# EAGLE board comms_v0 (EAGLE 9.6.2)
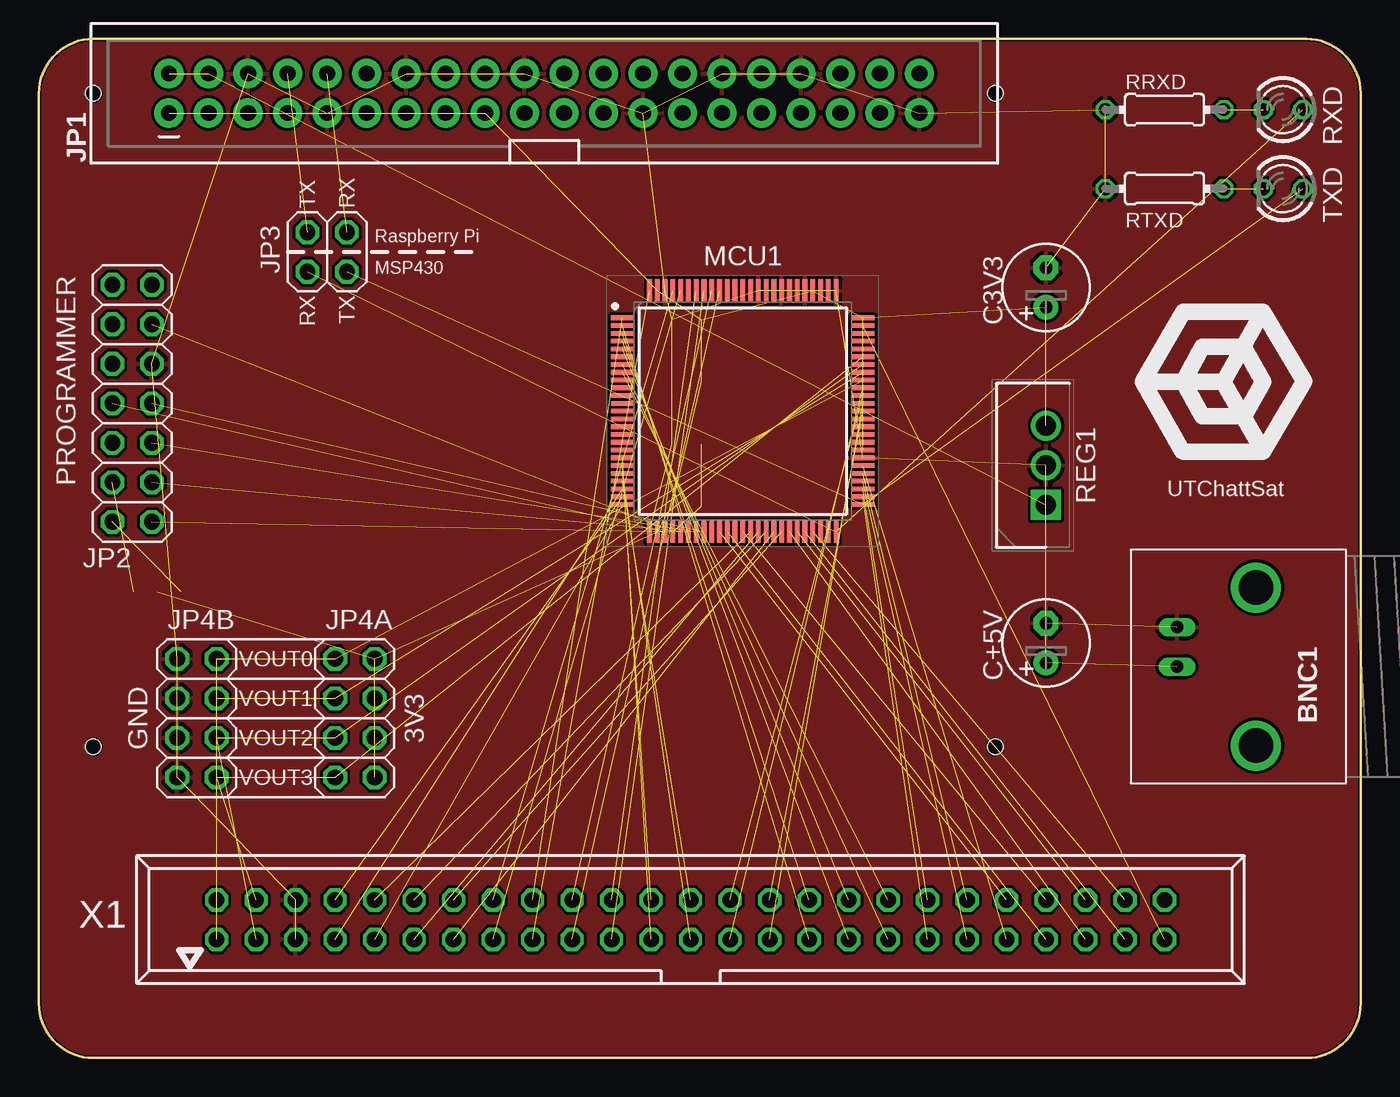
[diagram p0: board, top side]
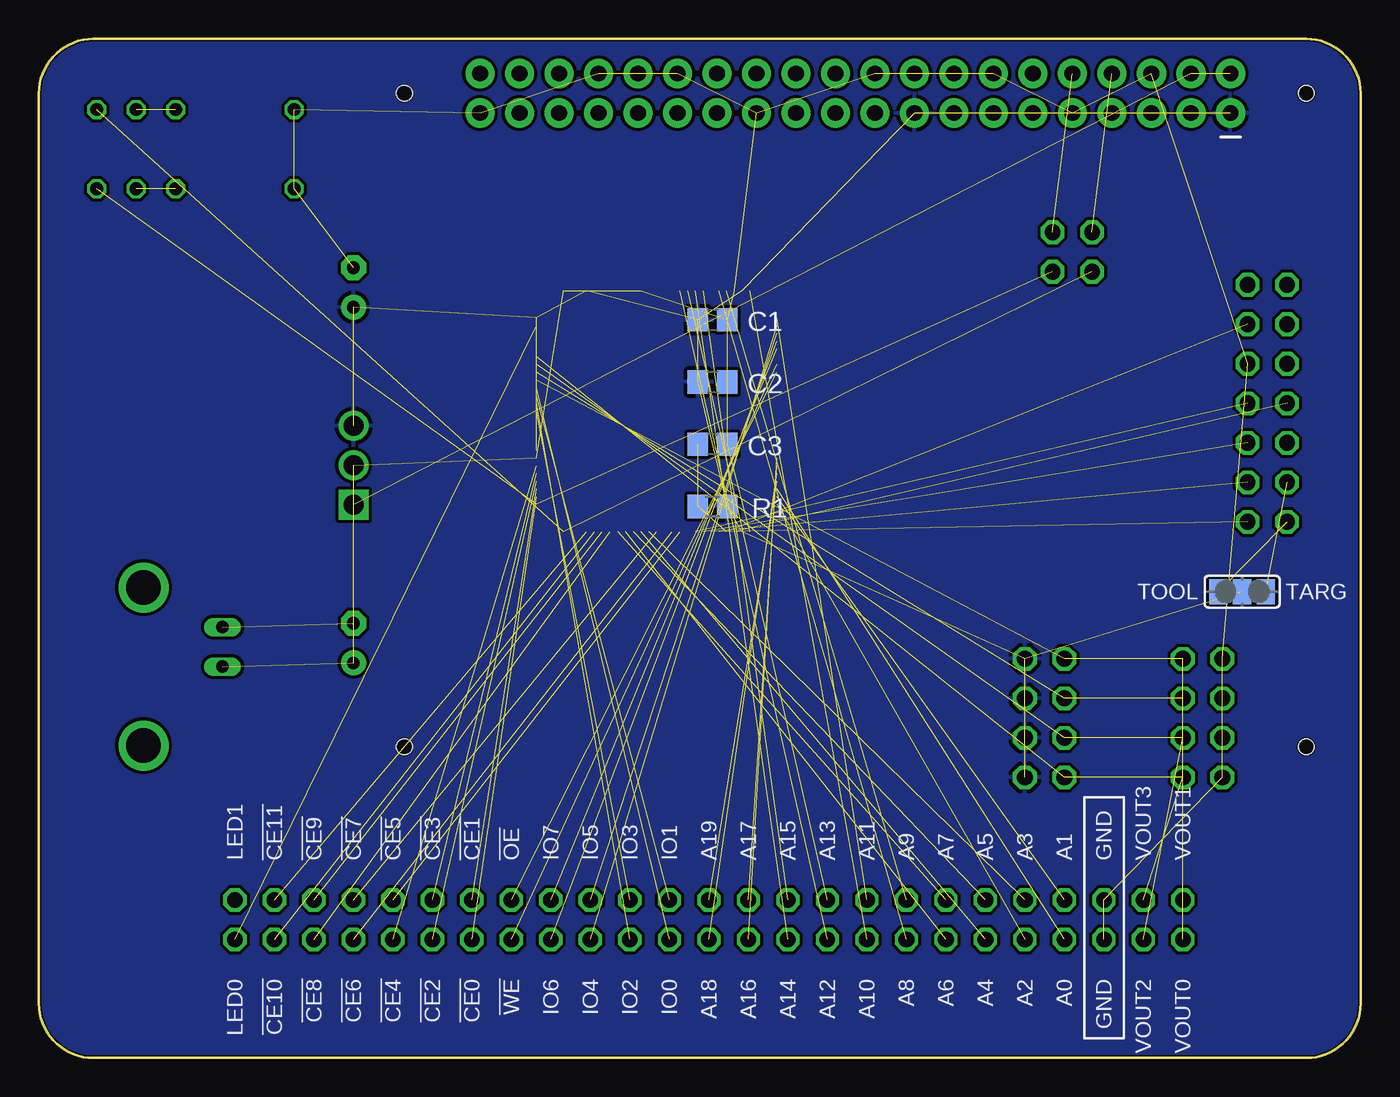
[diagram p1: board, bottom side, seen from below]

Size 85 x 65.51 mm. Coordinates in mm from the lower left corner, seen from the top.
Outline: 3.5,0 81.5,0 arc90 85,3.5 85,62.01 arc90 81.5,65.51 3.5,65.51 arc90 0,62.01 0,3.5 arc90 3.5,0
Copper layers (1*16): Top 0.035mm / dielectric 0.2mm / Bottom 0.035mm
Design rules "jlcpcb-2-layer *": minimum track width 10mil, minimum drill 0.2mm, track to track 8mil, track to pad 5mil, pad to pad 5mil, via to via 5mil, smd to smd 0mil, copper to edge 0.1mm, drill to drill 5mil, minimum pad ring 4mil, minimum via ring 4mil, stop-mask expansion 3mil, vias tented up to drill 100mil, thermal gap 10mil
Net classes: 2 lowpower: width 0.305 mm, drill 0.483 mm
Holes 1 mm at 3.5,62.01 61.5,62.01 61.5,20.01 3.5,20.01

## Footprints (pad centres in the part's own frame; a part is rotated, then mirrored left to right if it is on the bottom)
BNC = drill 2.2: 3 -5.08,5.08; 4 5.08,5.08 | drill 0.8 long: GND -2.54,0; S 0,0
C0805 = smd 1.3 x 1.5: 1 -0.95,0; 2 0.95,0
E2,5-6 = drill 0.813 pad 1.6: + -1.27,0 | drill 0.813 pad 1.6 octagon: - 1.27,0
2X20_SHROUDED = drill 1.016 pad 1.88: 1 -1.27,24.13; 2 1.27,24.13; 3 -1.27,21.59; 4 1.27,21.59; 5 -1.27,19.05; 6 1.27,19.05; 7 -1.27,16.51; 8 1.27,16.51; 9 -1.27,13.97; 10 1.27,13.97; 11 -1.27,11.43; 12 1.27,11.43; 13 -1.27,8.89; 14 1.27,8.89; 15 -1.27,6.35; 16 1.27,6.35; 17 -1.27,3.81; 18 1.27,3.81; 19 -1.27,1.27; 20 1.27,1.27; 21 -1.27,-1.27; 22 1.27,-1.27; 23 -1.27,-3.81; 24 1.27,-3.81; 25 -1.27,-6.35; 26 1.27,-6.35; 27 -1.27,-8.89; 28 1.27,-8.89; 29 -1.27,-11.43; 30 1.27,-11.43; 31 -1.27,-13.97; 32 1.27,-13.97; 33 -1.27,-16.51; 34 1.27,-16.51; 35 -1.27,-19.05; 36 1.27,-19.05; 37 -1.27,-21.59; 38 1.27,-21.59; 39 -1.27,-24.13; 40 1.27,-24.13
2X07 = drill 1.016 octagon: 1 -7.62,-1.27; 2 -7.62,1.27; 3 -5.08,-1.27; 4 -5.08,1.27; 5 -2.54,-1.27; 6 -2.54,1.27; 7 0,-1.27; 8 0,1.27; 9 2.54,-1.27; 10 2.54,1.27; 11 5.08,-1.27; 12 5.08,1.27; 13 7.62,-1.27; 14 7.62,1.27
2X02 = drill 1.016 octagon: 1 -1.27,-1.27; 2 -1.27,1.27; 3 1.27,-1.27; 4 1.27,1.27
2X04 = drill 1.016 octagon: 1 -3.81,-1.27; 2 -3.81,1.27; 3 -1.27,-1.27; 4 -1.27,1.27; 5 1.27,-1.27; 6 1.27,1.27; 7 3.81,-1.27; 8 3.81,1.27
QFP50P1600X1600X160-100N = smd 1.475 x 0.3: 1 -7.738,6; 2 -7.738,5.5; 3 -7.738,5; 4 -7.738,4.5; 5 -7.738,4; 6 -7.738,3.5; 7 -7.738,3; 8 -7.738,2.5; 9 -7.738,2; 10 -7.738,1.5; 11 -7.738,1; 12 -7.738,0.5; 13 -7.738,0; 14 -7.738,-0.5; 15 -7.738,-1; 16 -7.738,-1.5; 17 -7.738,-2; 18 -7.738,-2.5; 19 -7.738,-3; 20 -7.738,-3.5; 21 -7.738,-4; 22 -7.738,-4.5; 23 -7.738,-5; 24 -7.738,-5.5; 25 -7.738,-6; 51 7.738,-6; 52 7.738,-5.5; 53 7.738,-5; 54 7.738,-4.5; 55 7.738,-4; 56 7.738,-3.5; 57 7.738,-3; 58 7.738,-2.5; 59 7.738,-2; 60 7.738,-1.5; 61 7.738,-1; 62 7.738,-0.5; 63 7.738,0; 64 7.738,0.5; 65 7.738,1; 66 7.738,1.5; 67 7.738,2; 68 7.738,2.5; 69 7.738,3; 70 7.738,3.5; 71 7.738,4; 72 7.738,4.5; 73 7.738,5; 74 7.738,5.5; 75 7.738,6 | smd 0.3 x 1.475: 26 -6,-7.738; 27 -5.5,-7.738; 28 -5,-7.738; 29 -4.5,-7.738; 30 -4,-7.738; 31 -3.5,-7.738; 32 -3,-7.738; 33 -2.5,-7.738; 34 -2,-7.738; 35 -1.5,-7.738; 36 -1,-7.738; 37 -0.5,-7.738; 38 0,-7.738; 39 0.5,-7.738; 40 1,-7.738; 41 1.5,-7.738; 42 2,-7.738; 43 2.5,-7.738; 44 3,-7.738; 45 3.5,-7.738; 46 4,-7.738; 47 4.5,-7.738; 48 5,-7.738; 49 5.5,-7.738; 50 6,-7.738; 76 6,7.738; 77 5.5,7.738; 78 5,7.738; 79 4.5,7.738; 80 4,7.738; 81 3.5,7.738; 82 3,7.738; 83 2.5,7.738; 84 2,7.738; 85 1.5,7.738; 86 1,7.738; 87 0.5,7.738; 88 0,7.738; 89 -0.5,7.738; 90 -1,7.738; 91 -1.5,7.738; 92 -2,7.738; 93 -2.5,7.738; 94 -3,7.738; 95 -3.5,7.738; 96 -4,7.738; 97 -4.5,7.738; 98 -5,7.738; 99 -5.5,7.738; 100 -6,7.738
R0805 = smd 1.3 x 1.5: 1 -0.95,0; 2 0.95,0
TO254P470X1028X1955-3P = drill 1.29 pad 1.935 square: 1 0,0 | drill 1.29 pad 1.935: 2 2.54,0; 3 5.08,0
0204/7 = drill 0.813 octagon: 1 -3.81,0; 2 3.81,0
LED3MM = drill 0.813 octagon: A -1.27,0; K 1.27,0
SJ_2 = smd 1.168 x 1.6: 1 -1.524,0; 2 0,0; 3 1.524,0
057-050-1 = drill 1 octagon: 1 -30.48,-1.27; 2 -30.48,1.27; 3 -27.94,-1.27; 4 -27.94,1.27; 5 -25.4,-1.27; 6 -25.4,1.27; 7 -22.86,-1.27; 8 -22.86,1.27; 9 -20.32,-1.27; 10 -20.32,1.27; 11 -17.78,-1.27; 12 -17.78,1.27; 13 -15.24,-1.27; 14 -15.24,1.27; 15 -12.7,-1.27; 16 -12.7,1.27; 17 -10.16,-1.27; 18 -10.16,1.27; 19 -7.62,-1.27; 20 -7.62,1.27; 21 -5.08,-1.27; 22 -5.08,1.27; 23 -2.54,-1.27; 24 -2.54,1.27; 25 0,-1.27; 26 0,1.27; 27 2.54,-1.27; 28 2.54,1.27; 29 5.08,-1.27; 30 5.08,1.27; 31 7.62,-1.27; 32 7.62,1.27; 33 10.16,-1.27; 34 10.16,1.27; 35 12.7,-1.27; 36 12.7,1.27; 37 15.24,-1.27; 38 15.24,1.27; 39 17.78,-1.27; 40 17.78,1.27; 41 20.32,-1.27; 42 20.32,1.27; 43 22.86,-1.27; 44 22.86,1.27; 45 25.4,-1.27; 46 25.4,1.27; 47 27.94,-1.27; 48 27.94,1.27; 49 30.48,-1.27; 50 30.48,1.27

## Placement (x,y rotation side)
BNC1  BNC  [BNC]  73.19,25.16 270 top
C1  10u  [C0805]  41.68,47.45 0 bottom
C2  0.1u  [C0805]  41.68,43.45 0 bottom
C3  2.2n  [C0805]  41.68,39.45 0 bottom
C3V3  [E2,5-6]  64.77,49.53 90 top
C+5V  [E2,5-6]  64.77,26.67 90 top
JP1  RASPBERRYPI-40-PIN-GPIO_PTH  [2X20_SHROUDED]  32.5,62.01 90 top
JP2  [2X07]  6,42.08 90 top
JP3  [2X02]  18.54,51.82 0 top
JP4A  [2X04]  20.32,21.84 90 top
JP4B  [2X04]  10.16,21.84 90 top
MCU1  MSP430FR6989  [QFP50P1600X1600X160-100N]  45.27,41.58 0 top
R1  47k  [R0805]  41.68,35.45 0 bottom
REG1  LM3940  [TO254P470X1028X1955-3P]  64.77,35.56 90 top
RRXD  [0204/7]  72.39,60.96 0 top
RTXD  [0204/7]  72.39,55.88 0 top
RXD  [LED3MM]  80.01,60.96 180 top
SJ1  [SJ_2]  7.62,29.97 180 bottom
TXD  [LED3MM]  80.01,55.88 180 top
X1  PARALLEL COMMS  [057-050-1]  41.91,8.89 0 top

## Library data of the parts
BNC1 = SparkFun-Connectors; PROD_ID: LPA-12729; SF_ID: PRT-10550
C1-C3 C3V3 C+5V = rcl; SPICEPREFIX: C
JP1 = SparkFun-Connectors; PROD_ID: CONN-12263; SF_ID: PRT-13054
JP2 JP3 JP4A JP4B = pinhead
MCU1 = SamacSys_Parts; ARROW_PART_NUMBER: MSP430FR6989IPZR; ARROW_PRICE-STOCK: https://www.arrow.com/en/products/msp430fr6989ipzr/texas-instruments?region=nac; DESCRIPTION: MSP430FR6989 16 MHz ULP Microcontroller - 128 KB FRAM, 2KB SRAM, 83 IO, ADC12, LCD, AES, Scan IF; HEIGHT: 1.6mm; MANUFACTURER_NAME: Texas Instruments; MANUFACTURER_PART_NUMBER: MSP430FR6989IPZR; MOUSER_PART_NUMBER: 595-MSP430FR6989IPZR; MOUSER_PRICE-STOCK: https://www.mouser.co.uk/ProductDetail/Texas-Instruments/MSP430FR6989IPZR?qs=m1T3c8F5IULmogipCvLVbA%3D%3D
R1 RRXD RTXD = rcl; SPICEPREFIX: R
REG1 = SamacSys_Parts; ARROW_PART_NUMBER: LM3940IT-3.3/NOPB; ARROW_PRICE-STOCK: https://www.arrow.com/en/products/lm3940it-3.3nopb/texas-instruments?region=nac; DESCRIPTION: 1A,3.3V,LDO Voltage Reg.,LM3940IT-3.3 Texas Instruments LM3940IT-3.3/NOPB, LDO Voltage Regulator, 1A, 3.3 V, 4.5 7.5 Vin, 3-Pin TO-220; HEIGHT: 4.7mm; MANUFACTURER_NAME: Texas Instruments; MANUFACTURER_PART_NUMBER: LM3940IT-3.3/NOPB; MOUSER_PART_NUMBER: 926-LM3940IT-3.3NOPB; MOUSER_PRICE-STOCK: https://www.mouser.co.uk/ProductDetail/Texas-Instruments/LM3940IT-33-NOPB?qs=QbsRYf82W3FGrjqcSAbcdA%3D%3D
RXD TXD = led
SJ1 = jumper
X1 = con-panduit; OC_FARNELL: unknown; OC_NEWARK: unknown

## Nets
3V3: C1.1 C2.1 C3V3.+ JP1.1 JP1.17 JP4A.1 JP4A.3 JP4A.5 JP4A.7 MCU1.27 MCU1.58 MCU1.75 MCU1.79 MCU1.99 R1.2 REG1.3 SJ1.2
!CE0: MCU1.52 X1.37
!CE1: MCU1.53 X1.38
!CE2: MCU1.54 X1.39
!CE3: MCU1.55 X1.40
!CE4: MCU1.56 X1.41
!CE5: MCU1.35 X1.42
!CE6: MCU1.36 X1.43
!CE7: MCU1.38 X1.44
!CE8: MCU1.44 X1.45
!CE9: MCU1.45 X1.46
!CE10: MCU1.46 X1.47
!CE11: MCU1.47 X1.48
!OE: MCU1.8 X1.36
!RST: C3.1 JP2.11 MCU1.29 R1.1
!WE: MCU1.7 X1.35
+5V: BNC1.S C+5V.+ JP1.2 JP1.4 REG1.1
A0: MCU1.23 X1.7
A1: MCU1.24 X1.8
A2: MCU1.25 X1.9
A3: MCU1.39 X1.10
A4: MCU1.40 X1.11
A5: MCU1.41 X1.12
A6: MCU1.42 X1.13
A7: MCU1.43 X1.14
A8: MCU1.96 X1.15
A9: MCU1.97 X1.16
A10: MCU1.100 X1.17
A11: MCU1.1 X1.18
A12: MCU1.91 X1.19
A13: MCU1.92 X1.20
A14: MCU1.93 X1.21
A15: MCU1.94 X1.22
A16: MCU1.19 X1.23
A17: MCU1.20 X1.24
A18: MCU1.21 X1.25
A19: MCU1.22 X1.26
GND: BNC1.GND C1.2 C2.2 C3.2 C3V3.- C+5V.- JP1.6 JP1.9 JP1.14 JP1.20 JP1.25 JP1.30 JP1.34 JP1.39 JP2.9 JP4B.2 JP4B.4 JP4B.6 JP4B.8 MCU1.26 MCU1.57 MCU1.76 MCU1.80 MCU1.83 MCU1.86 MCU1.98 REG1.2 RRXD.1 RTXD.1 X1.5 X1.6
IO0: MCU1.66 X1.27
IO1: MCU1.65 X1.28
IO2: MCU1.64 X1.29
IO3: MCU1.63 X1.30
IO4: MCU1.2 X1.31
IO5: MCU1.3 X1.32
IO6: MCU1.4 X1.33
IO7: MCU1.5 X1.34
LED0: MCU1.74 X1.49
LED1: X1.50
MCU_RXD: JP3.1 MCU1.50 RXD.A
MCU_TXD: JP3.3 MCU1.51 TXD.A
N$1: RTXD.2 TXD.K
N$2: RRXD.2 RXD.K
RPI_RXD: JP1.10 JP3.4
RPI_TXD: JP1.8 JP3.2
TCK: JP2.7 MCU1.33
TDI: JP2.3 MCU1.31
TDO: JP2.1 MCU1.30
TEST: JP2.8 MCU1.28
TMS: JP2.5 MCU1.32
VCCTARGET: JP2.4 SJ1.1
VCCTOOL: JP2.2 SJ1.3
VOUT0: JP4A.8 JP4B.7 MCU1.67 X1.1
VOUT1: JP4A.6 JP4B.5 MCU1.68 X1.2
VOUT2: JP4A.4 JP4B.3 MCU1.69 X1.3
VOUT3: JP4A.2 JP4B.1 MCU1.70 X1.4

## Tracks (layer width: path | path; a pad name or v marks a point on that pad's centre or on a via)
3V3  (16 unrouted)
  pour Bottom: 0,66.04 85.09,66.04 85.09,0 0,0
!CE0  (1 unrouted)
!CE1  (1 unrouted)
!CE2  (1 unrouted)
!CE3  (1 unrouted)
!CE4  (1 unrouted)
!CE5  (1 unrouted)
!CE6  (1 unrouted)
!CE7  (1 unrouted)
!CE8  (1 unrouted)
!CE9  (1 unrouted)
!CE10  (1 unrouted)
!CE11  (1 unrouted)
!OE  (1 unrouted)
!RST  (3 unrouted)
!WE  (1 unrouted)
+5V  (4 unrouted)
A0  (1 unrouted)
A1  (1 unrouted)
A2  (1 unrouted)
A3  (1 unrouted)
A4  (1 unrouted)
A5  (1 unrouted)
A6  (1 unrouted)
A7  (1 unrouted)
A8  (1 unrouted)
A9  (1 unrouted)
A10  (1 unrouted)
A11  (1 unrouted)
A12  (1 unrouted)
A13  (1 unrouted)
A14  (1 unrouted)
A15  (1 unrouted)
A16  (1 unrouted)
A17  (1 unrouted)
A18  (1 unrouted)
A19  (1 unrouted)
GND  (30 unrouted)
  pour Top: 0,66.04 85.09,66.04 85.09,0 0,0
IO0  (1 unrouted)
IO1  (1 unrouted)
IO2  (1 unrouted)
IO3  (1 unrouted)
IO4  (1 unrouted)
IO5  (1 unrouted)
IO6  (1 unrouted)
IO7  (1 unrouted)
LED0  (1 unrouted)
MCU_RXD  (2 unrouted)
MCU_TXD  (2 unrouted)
N$1  (1 unrouted)
N$2  (1 unrouted)
RPI_RXD  (1 unrouted)
RPI_TXD  (1 unrouted)
TCK  (1 unrouted)
TDI  (1 unrouted)
TDO  (1 unrouted)
TEST  (1 unrouted)
TMS  (1 unrouted)
VCCTARGET  (1 unrouted)
VCCTOOL  (1 unrouted)
VOUT0  (3 unrouted)
VOUT1  (3 unrouted)
VOUT2  (3 unrouted)
VOUT3  (3 unrouted)

## Text on the board
tPlace: TX | RX | Raspberry Pi | MSP430 | PROGRAMMER | RX | TX | VOUT0 | VOUT1 | GND | 3V3 | VOUT2 | VOUT3
bPlace: TARG | TOOL | VOUT1 | VOUT3 | GND | A1 | A3 | A5 | A7 | A9 | A11 | A13 | A15 | A17 | A19 | IO1 | IO3 | IO5 | IO7 | !OE | !CE1 | !CE3 | !CE5 | !CE7 | !CE9 | !CE11 | LED1 | VOUT0 | VOUT2 | GND | A0 | A2 | A4 | A6 | A8 | A10 | A12 | A14 | A16 | A18 | IO0 | IO2 | IO4 | IO6 | !WE | !CE0 | !CE2 | !CE4 | !CE6 | !CE8 | !CE10 | LED0
tNames: UTChattSat